# EAGLE board SS (EAGLE 9.3.0)
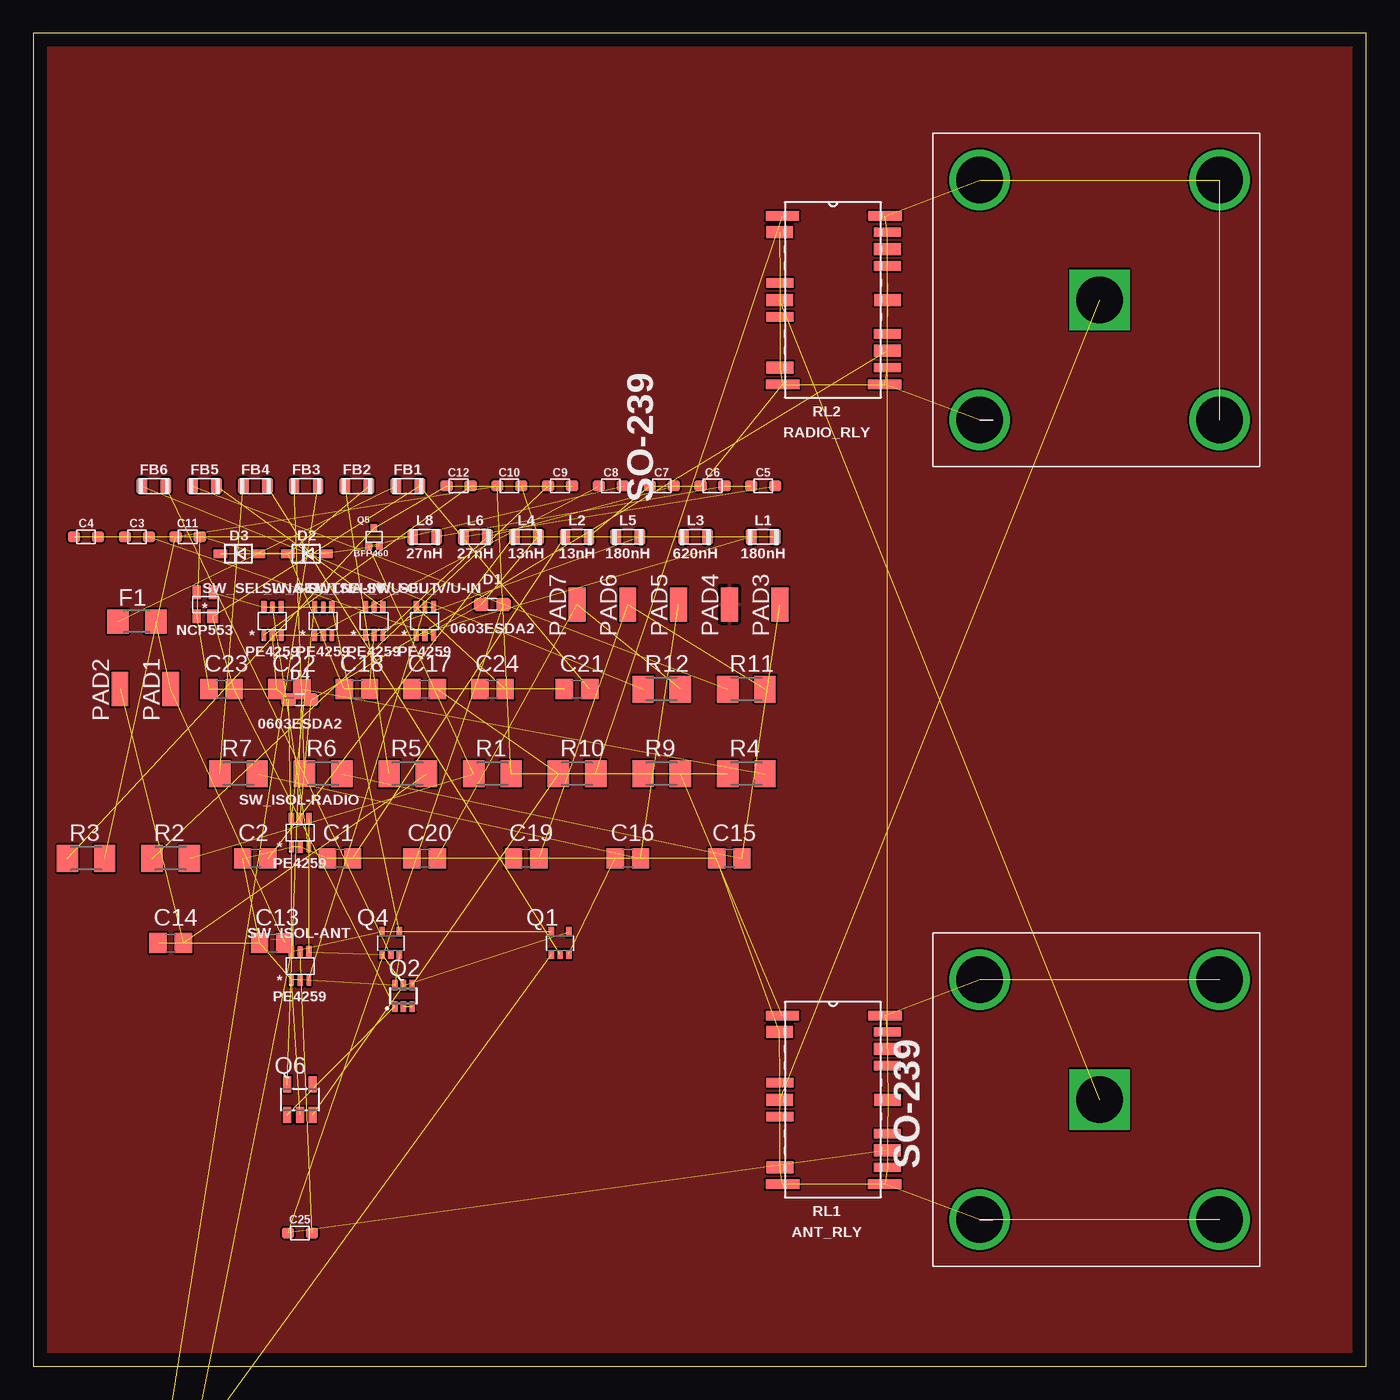
[diagram p0: board, top side]
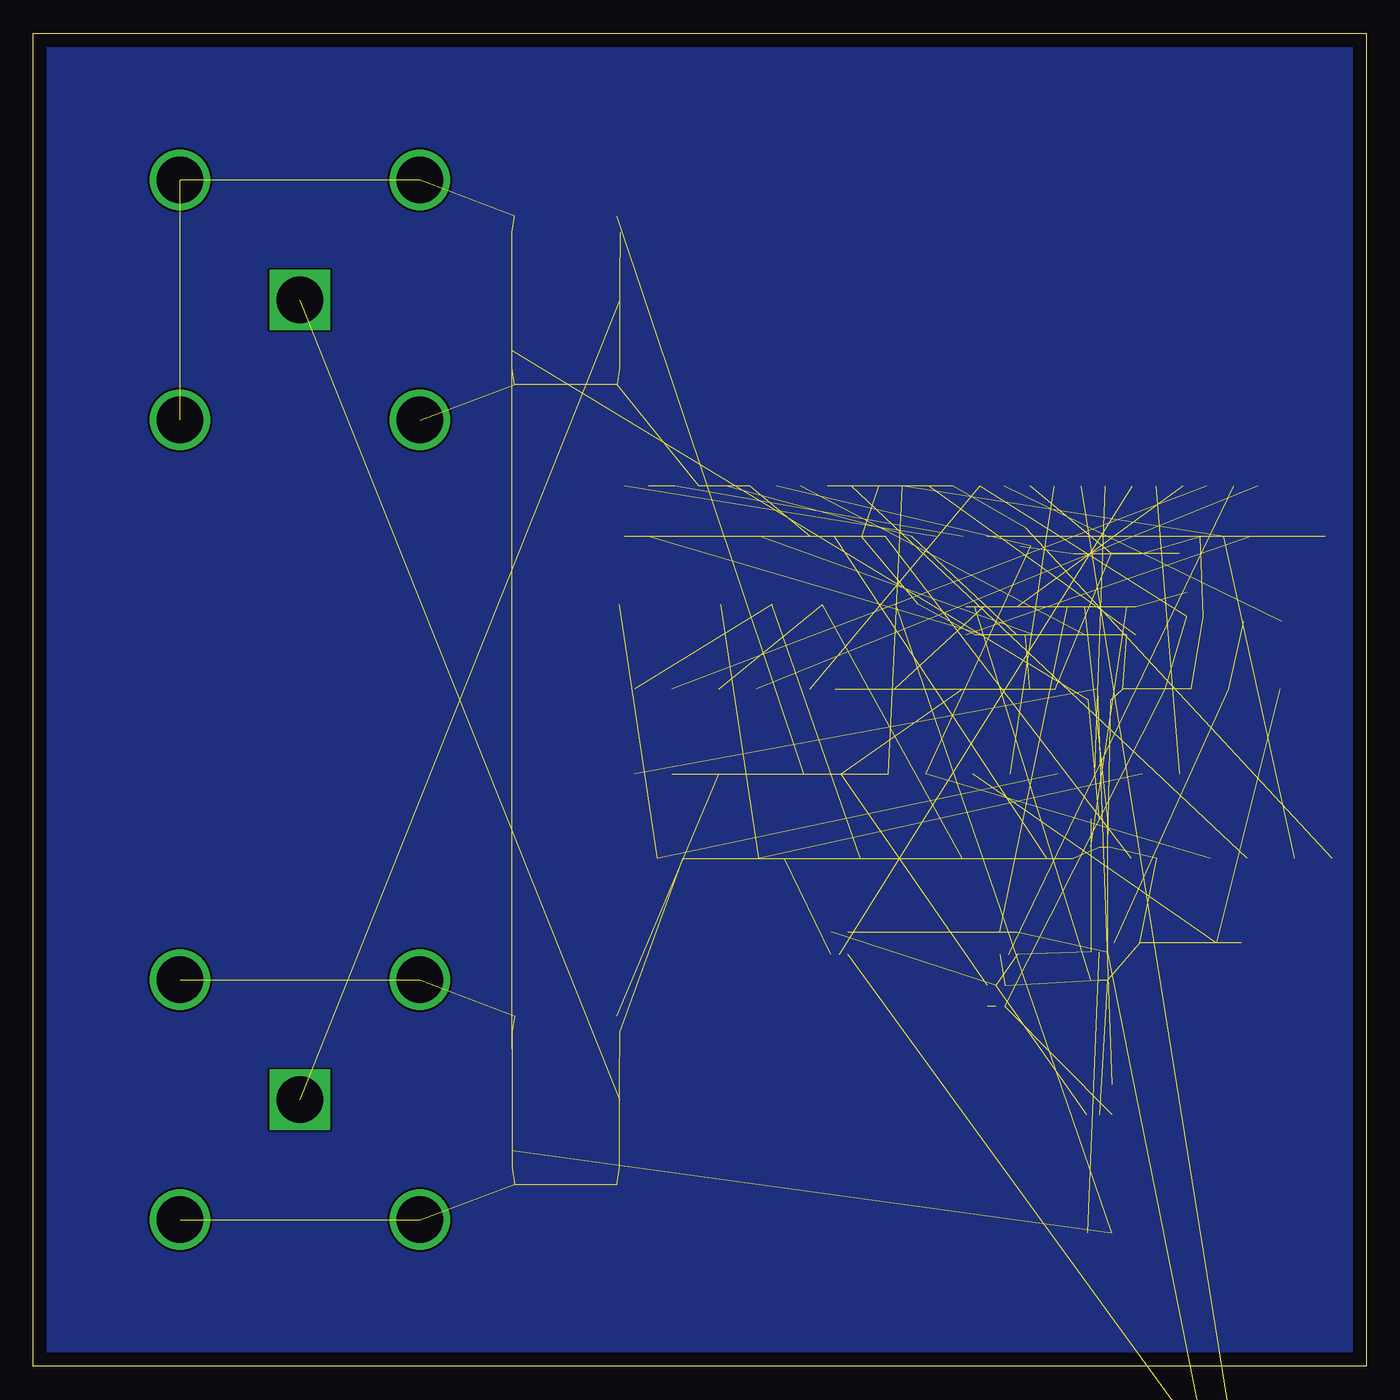
[diagram p1: board, bottom side, seen from below]

Size 100 x 100 mm. Coordinates in mm from the lower left corner, seen from the top.
Outline: 0,0 100,0 100,100 0,100 0,0
Copper layers (1*16): Top 0.035mm / dielectric 1.5mm / Bottom 0.035mm
Design rules "default": minimum track width 6mil, minimum drill 0.35mm, track to track 6mil, track to pad 6mil, pad to pad 6mil, via to via 6mil, smd to smd 6mil, copper to edge 40mil, drill to drill 6mil, minimum pad ring 10mil, minimum via ring 8mil, stop-mask expansion 4mil, vias tented up to drill 0mil, thermal gap 10mil

## Footprints (pad centres in the part's own frame; a part is rotated, then mirrored left to right if it is on the bottom)
C0805 = smd 1.3 x 1.5: 1 -0.95,0; 2 0.95,0
GRM18 = smd 0.9 x 0.8: P$1 -0.9,0; P$2 0.9,0
0603 = smd 1.1 x 1: 1 -0.85,0; 2 0.85,0
SOD-323 = smd 1.016 x 0.635: A 1.481,0; C -1.354,0
R1206 = smd 1.6 x 1.803: 1 -1.422,0; 2 1.422,0
0805 = smd 0.8 x 1.2: P$1 -0.9,0; P$2 0.9,0
SMD1,27-2,54 = smd 1.27 x 2.54: 1 0,0
SC70-5 = smd 0.4 x 0.7: 1 -0.65,-0.85; 2 0,-0.85; 3 0.65,-0.85; 4 0.65,0.85; 5 -0.65,0.85
SOT363 = smd 0.4 x 0.8: 1 -0.65,-0.8; 2 0,-0.8; 3 0.65,-0.8; 4 0.65,0.8; 5 0,0.8; 6 -0.65,0.8
TSFP-3 = smd 0.5 x 0.55: 1 -0.4,-0.7; 2 0.4,-0.7 | smd 0.5 x 0.6: 3 0,0.635
SOT23-5L = smd 0.6 x 1.2: 1 -0.95,-1.15; 2 0,-1.15; 3 0.95,-1.15; 4 0.95,1.15; 5 -0.95,1.15
SC-82AB = smd 0.6 x 1.016: 1 -0.6,-0.9; 3 0.6,0.9; 4 -0.6,0.9 | smd 0.8 x 1.016: 2 0.6,-0.9
M1206 = smd 1.6 x 2: 1 -1.4,0; 2 1.4,0
RELAY-TE-HF3 = smd 2.5 x 0.7: 1 -3.8,6.3; 11 -3.783,-6.348; 12 3.883,-6.348; 22 3.9,6.3 | smd 2 x 0.9: 2 -4.01,5.082; 6 -4,0; 10 -3.975,-5.077; 14 4.083,-3.808; 17 4.1,0; 20 4.083,3.812 | smd 2 x 0.7: 5 -3.983,1.272; 7 -3.983,-1.268; 13 4.083,-5.077; 15 4.083,-2.538; 19 4.083,2.542; 21 4.083,5.082
SC-70 = smd 0.4 x 0.9: 1 -0.635,-1.035; 2 0.015,-1.035; 3 0.665,-1.035; 4 0.665,1.065; 5 0.015,1.065; 6 -0.635,1.065
SC59-BEC = smd 1 x 1.4: B -0.95,-1.2; C 0,1.2; E 0.95,-1.2
SO-239 = drill 3.5 square: P$1 0,0 | drill 3.5: P$2 -9,9; P$3 9,9; P$4 -9,-9; P$5 9,-9

## Placement (x,y rotation side)
C1  100pF  [C0805]  23.01,38.1 0 top
C2  100pF  [C0805]  16.66,38.1 0 top
C3  27pF  [GRM18]  7.77,62.23 0 top
C4  6.8pF  [GRM18]  3.96,62.23 0 top
C5  6.8pF  [GRM18]  54.76,66.04 0 top
C6  43pF  [GRM18]  50.95,66.04 0 top
C7  4.7pF  [GRM18]  47.14,66.04 0 top
C8  390pF  [GRM18]  43.33,66.04 0 top
C9  390pF  [GRM18]  39.52,66.04 0 top
C10  390pF  [GRM18]  35.71,66.04 0 top
C11  220nF  [GRM18]  11.58,62.23 0 top
C12  390pF  [GRM18]  31.9,66.04 0 top
C13  0.001µ  [C0805]  17.93,31.75 0 top
C14  0.001µ  [C0805]  10.31,31.75 0 top
C15  0.001µ  [C0805]  52.22,38.1 0 top
C16  0.001µ  [C0805]  44.6,38.1 0 top
C17  0.1µ  [C0805]  29.36,50.8 0 top
C18  0.1µ  [C0805]  24.28,50.8 0 top
C19  0.001µ  [C0805]  36.98,38.1 0 top
C20  0.001µ  [C0805]  29.36,38.1 0 top
C21  0.33µ  [C0805]  40.79,50.8 0 top
C22  0.1µ  [C0805]  19.2,50.8 0 top
C23  1µ  [C0805]  14.12,50.8 0 top
C24  0.33µ  [C0805]  34.44,50.8 0 top
C25  390pF  [GRM18]  20,10 0 top
D1  0603ESDA2  [0603]  34.44,57.15 0 top
D2  [SOD-323]  20.47,60.96 0 top
D3  [SOD-323]  15.39,60.96 0 top
D4  0603ESDA2  [0603]  20,50 0 top
F1  [R1206]  7.77,55.88 0 top
FB1  [0805]  28.09,66.04 0 top
FB2  [0805]  24.28,66.04 0 top
FB3  [0805]  20.47,66.04 0 top
FB4  [0805]  16.66,66.04 0 top
FB5  [0805]  12.85,66.04 0 top
FB6  [0805]  9.04,66.04 0 top
L1  180nH  [0805]  54.76,62.23 0 top
L2  13nH  [0805]  40.79,62.23 0 top
L3  620nH  [0805]  49.68,62.23 0 top
L4  13nH  [0805]  36.98,62.23 0 top
L5  180nH  [0805]  44.6,62.23 0 top
L6  27nH  [0805]  33.17,62.23 0 top
L8  27nH  [0805]  29.36,62.23 0 top
PAD1  13.8V  [SMD1,27-2,54]  10.31,50.8 0 top
PAD2  TX INH  [SMD1,27-2,54]  6.5,50.8 0 top
PAD3  TX_GND  [SMD1,27-2,54]  56.03,57.15 0 top
PAD4  GND  [SMD1,27-2,54]  52.22,57.15 0 top
PAD5  BYPASS  [SMD1,27-2,54]  48.41,57.15 0 top
PAD6  UHF  [SMD1,27-2,54]  44.6,57.15 0 top
PAD7  AMP_OFF  [SMD1,27-2,54]  40.79,57.15 0 top
Q1  SN74AHC-OR  [SC70-5]  39.52,31.75 0 top
Q2  UMD5N  [SOT363]  27.77,27.78 0 top
Q4  SN74AHC-OR  [SC70-5]  26.82,31.75 0 top
Q5  BFP460  [TSFP-3]  25.55,62.23 0 top
Q6  L78L05  [SOT23-5L]  20,20 0 top
Q7  NCP553  [SC-82AB]  12.85,57.15 0 top
R1  82kΩ  [M1206]  34.44,44.45 0 top
R2  430Ω  [M1206]  10.31,38.1 0 top
R3  300Ω  [M1206]  3.96,38.1 0 top
R4  130Ω  [M1206]  53.49,44.45 0 top
R5  10kΩ  [M1206]  28.09,44.45 0 top
R6  10kΩ  [M1206]  21.74,44.45 0 top
R7  10kΩ  [M1206]  15.39,44.45 0 top
R9  100Ω  [M1206]  47.14,44.45 0 top
R10  100Ω  [M1206]  40.79,44.45 0 top
R11  10kΩ  [M1206]  53.49,50.8 0 top
R12  10kΩ  [M1206]  47.14,50.8 0 top
RL1  ANT_RLY  [RELAY-TE-HF3]  60,20 0 top
RL2  RADIO_RLY  [RELAY-TE-HF3]  60,80 0 top
SW_ISOL-ANT  PE4259  [SC-70]  20,30 0 top
SW_ISOL-RADIO  PE4259  [SC-70]  20,40 0 top
SW_SEL_LNA-IN  PE4259  [SC-70]  21.74,55.88 0 top
SW_SEL_LNA-OUT  PE4259  [SC-70]  17.93,55.88 0 top
SW_SEL_V/U-IN  PE4259  [SC-70]  29.36,55.88 0 top
SW_SEL_V/U-OUT  PE4259  [SC-70]  25.55,55.88 0 top
T1  MMBTRA104SS  [SC59-BEC]  10,-10 0 top  (outside the outline)
X1  SO-239  [SO-239]  80,80 0 top
X2  SO-239  [SO-239]  80,20 0 top

## Library data of the parts
C1 C2 C13-C24 = rcl; SPICEPREFIX: C
C3-C12 C25 D1-D4 FB1-FB6 L1-L6 L8 Q1 Q2 Q4-Q7 SW_ISOL-ANT SW_ISOL-RADIO SW_SEL_LNA-IN SW_SEL_LNA-OUT SW_SEL_V/U-IN SW_SEL_V/U-OUT X1 X2 = aarf
F1 = adafruit
PAD1-PAD7 = wirepad
R1-R7 R9-R12 = rcl; SPICEPREFIX: R
RL1 RL2 = aarf; IMPEDANCE: 50R
T1 = transistor

## Nets
0: C1.1 C2.1 C3.P$1 C6.P$1 C7.P$1 C10.P$2 C11.P$2 C13.1 C14.1 C15.1 C16.1 C17.1 C18.2 C19.1 C20.1 C21.1 C22.1 C23.1 C24.1 D1.1 D2.A D3.A D4.1 L2.P$2 L4.P$2 Q1.3 Q2.6 Q4.3 Q5.2 Q6.2 Q7.1 RL1.2 RL1.5 RL1.7 RL1.10 RL1.11 RL1.12 RL1.13 RL1.15 RL1.17 RL1.19 RL1.21 RL1.22 RL2.2 RL2.5 RL2.7 RL2.10 RL2.11 RL2.12 RL2.13 RL2.15 RL2.17 RL2.19 RL2.21 RL2.22 SW_ISOL-ANT.1 SW_ISOL-ANT.2 SW_ISOL-RADIO.1 SW_ISOL-RADIO.2 SW_SEL_LNA-IN.2 SW_SEL_LNA-OUT.2 SW_SEL_V/U-IN.2 SW_SEL_V/U-OUT.2 X1.P$2 X1.P$3 X1.P$4 X1.P$5 X2.P$2 X2.P$3 X2.P$4 X2.P$5
3V: C24.2 Q1.5 Q4.5 Q7.3 SW_ISOL-ANT.6 SW_ISOL-RADIO.6 SW_SEL_LNA-IN.6 SW_SEL_LNA-OUT.6 SW_SEL_V/U-IN.6 SW_SEL_V/U-OUT.6 T1.E
5V: C22.2 Q6.5 R4.2
13.8V: C21.2 C23.2 FB1.P$2 Q2.1 Q6.1 Q7.2
AMP+BPF_OUT: D4.2 RL2.14 SW_ISOL-RADIO.5
AMP_OFF: FB6.P$2 Q4.2
ANTENNA: RL1.6 X1.P$1
BPF_IN: SW_ISOL-ANT.3 SW_SEL_V/U-IN.5
BPF_OUT: SW_SEL_LNA-IN.5 SW_SEL_V/U-OUT.5
DRIVE_TX: FB3.P$2 T1.B
EXT_BYPASS: FB4.P$2 Q1.2
GND: PAD4.1
LNA-SW_OUT: SW_ISOL-RADIO.3 SW_SEL_LNA-OUT.5
LNA_BYPASS: SW_SEL_LNA-IN.3 SW_SEL_LNA-OUT.3
LNA_IN: C8.P$1 SW_SEL_LNA-IN.1
LNA_OFF: Q4.4 SW_SEL_LNA-IN.4 SW_SEL_LNA-OUT.4
LNA_OUT: C12.P$2 SW_SEL_LNA-OUT.1
N$1: R9.2 RL1.1
N$3: L1.P$1 SW_SEL_V/U-IN.1
N$4: C3.P$2 C4.P$1 SW_SEL_V/U-IN.3
N$5: C1.2 L1.P$2 L2.P$1 L3.P$1
N$6: C25.P$2 SW_ISOL-ANT.5
N$7: L5.P$2 SW_SEL_V/U-OUT.1
N$9: C13.2 F1.2 PAD1.1
N$10: C16.2 PAD5.1 R7.2
N$12: C19.2 PAD6.1 R11.2
N$13: F1.1 FB1.P$1
N$14: C2.2 L3.P$2 L4.P$1 L5.P$1
N$15: C20.2 PAD7.1 R12.2
N$16: C15.2 PAD3.1 R6.2
N$17: C8.P$2 Q5.1 R1.1 R2.2
N$18: C4.P$2 L8.P$1
N$19: C5.P$1 C6.P$2 L8.P$2
N$20: C5.P$2 L6.P$1
N$21: C7.P$2 L6.P$2 SW_SEL_V/U-OUT.3
N$22: C9.P$1 R2.1
N$24: C10.P$1 C11.P$1 R1.2 R3.2 R4.1
N$25: C9.P$2 C12.P$1 Q5.3 R3.1
N$26: C14.2 PAD2.1 R5.2
N$27: FB2.P$1 R5.1
N$28: FB3.P$1 R6.1
N$30: R10.2 RL2.1
N$32: FB4.P$1 R7.1
N$36: Q2.2 Q2.3
N$42: FB5.P$1 R11.1
N$45: FB6.P$1 R12.1
RADIO: RL2.6 X2.P$1
RADIO_TX: Q1.1 T1.C
RELAY-TO-RELAY_BYPASS: RL1.20 RL2.20
RELAY_PWR: C17.2 C18.1 D2.C D3.C FB2.P$2 Q2.4 R9.1 R10.1
RLY_BYPASS: Q1.4 Q2.5 Q4.1 Q6.3 SW_ISOL-ANT.4 SW_ISOL-RADIO.4
SEL_BPF_UHF: FB5.P$2 SW_SEL_V/U-IN.4 SW_SEL_V/U-OUT.4
TO_BPF: C25.P$1 D1.2 RL1.14

## Tracks (layer width: path | path; a pad name or v marks a point on that pad's centre or on a via)
0  (70 unrouted)
3V  (10 unrouted)
5V  (2 unrouted)
13.8V  (5 unrouted)
AMP+BPF_OUT  (2 unrouted)
AMP_OFF  (1 unrouted)
ANTENNA  (1 unrouted)
BPF_IN  (1 unrouted)
BPF_OUT  (1 unrouted)
DRIVE_TX  (1 unrouted)
EXT_BYPASS  (1 unrouted)
GND
  pour Top: 0,100 0,0 100,0 100,100
  pour Bottom: 0,100 0,0 100,0 100,100
LNA-SW_OUT  (1 unrouted)
LNA_BYPASS  (1 unrouted)
LNA_IN  (1 unrouted)
LNA_OFF  (2 unrouted)
LNA_OUT  (1 unrouted)
N$1  (1 unrouted)
N$3  (1 unrouted)
N$4  (2 unrouted)
N$5  (3 unrouted)
N$6  (1 unrouted)
N$7  (1 unrouted)
N$9  (2 unrouted)
N$10  (2 unrouted)
N$12  (2 unrouted)
N$13  (1 unrouted)
N$14  (3 unrouted)
N$15  (2 unrouted)
N$16  (2 unrouted)
N$17  (3 unrouted)
N$18  (1 unrouted)
N$19  (2 unrouted)
N$20  (1 unrouted)
N$21  (2 unrouted)
N$22  (1 unrouted)
N$24  (4 unrouted)
N$25  (3 unrouted)
N$26  (2 unrouted)
N$27  (1 unrouted)
N$28  (1 unrouted)
N$30  (1 unrouted)
N$32  (1 unrouted)
N$36  (1 unrouted)
N$42  (1 unrouted)
N$45  (1 unrouted)
RADIO  (1 unrouted)
RADIO_TX  (1 unrouted)
RELAY-TO-RELAY_BYPASS  (1 unrouted)
RELAY_PWR  (7 unrouted)
RLY_BYPASS  (5 unrouted)
SEL_BPF_UHF  (2 unrouted)
TO_BPF  (2 unrouted)